# Altium PCB ARM2.22.PcbDoc (part 1 of 2)
Units mil, origin at the board's own origin, x right, y up, seen from the top; angles counter-clockwise.
Board outline 3929.03 x 3937.01 mil, 4 copper layers (Top Layer, GND, VCC, Bottom Layer); 147 components, 96 nets, 586 pads, 207 vias.
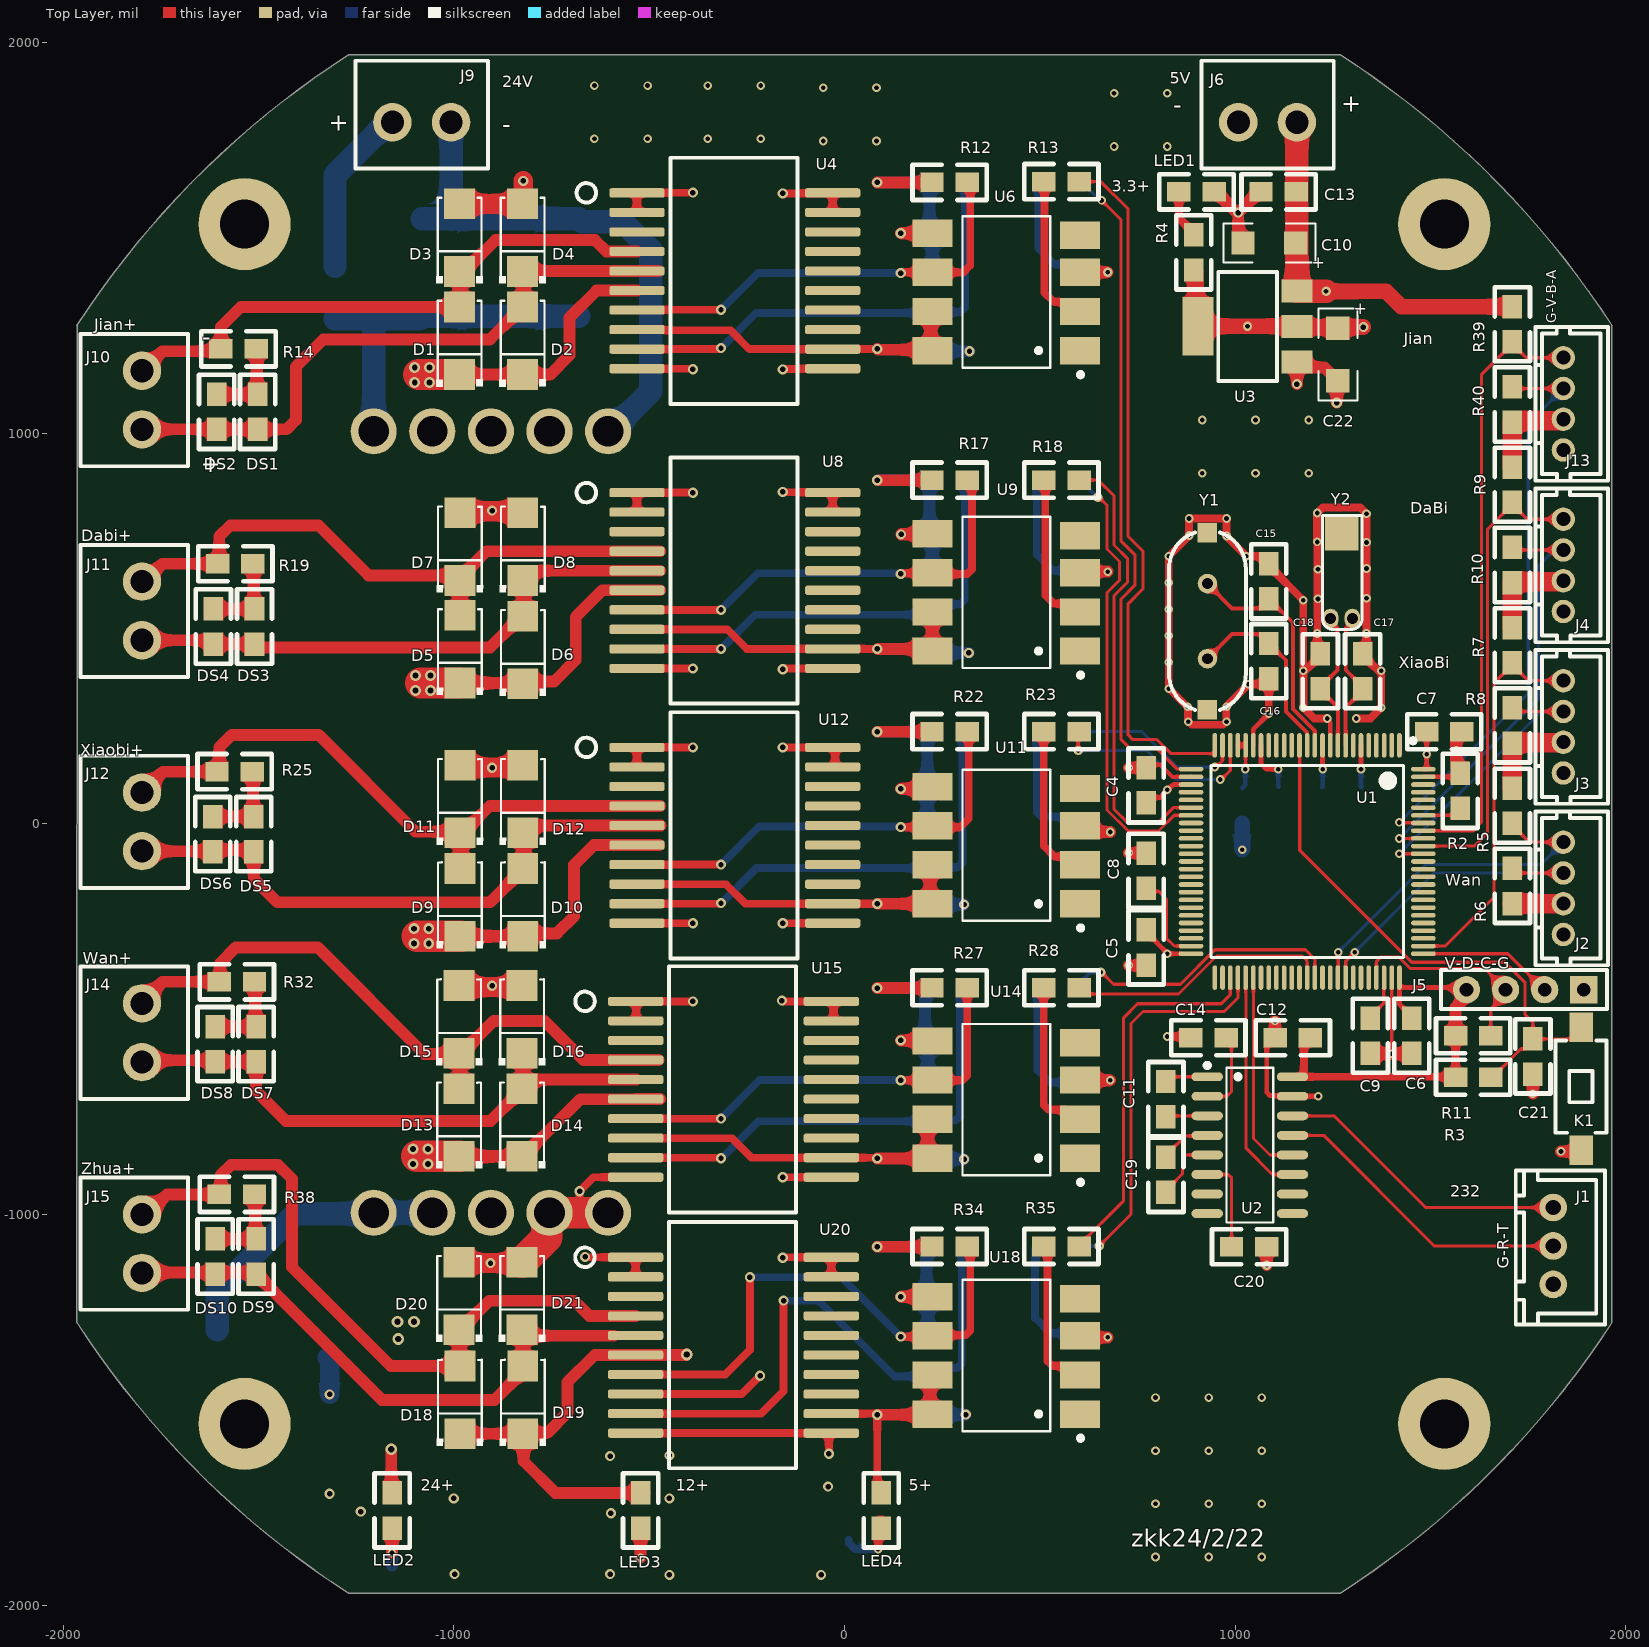
[diagram p0: Top Layer view]
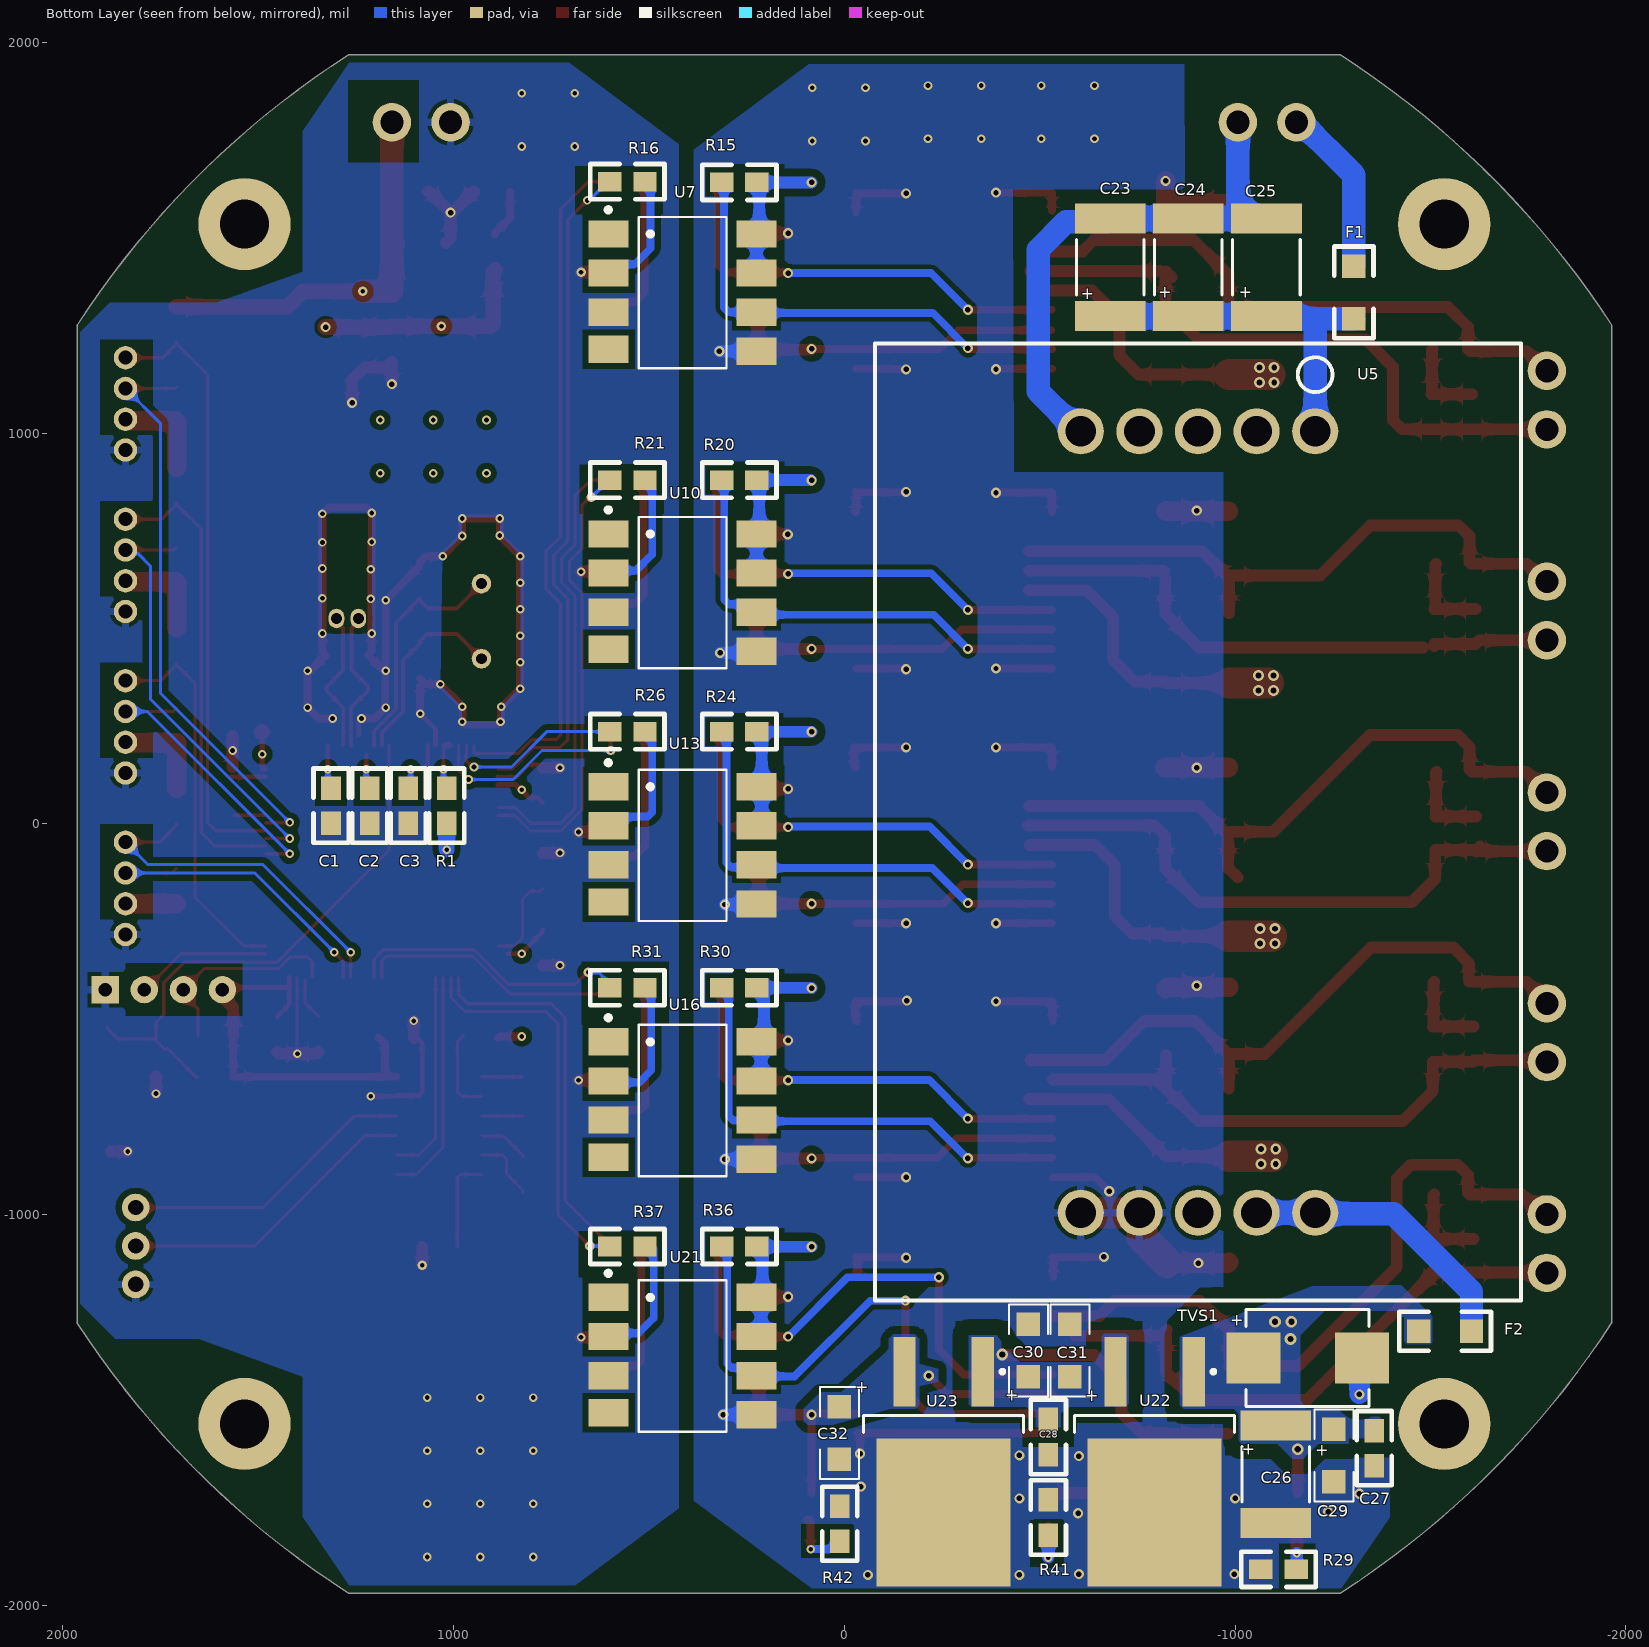
[diagram p1: Bottom Layer view, seen from below]
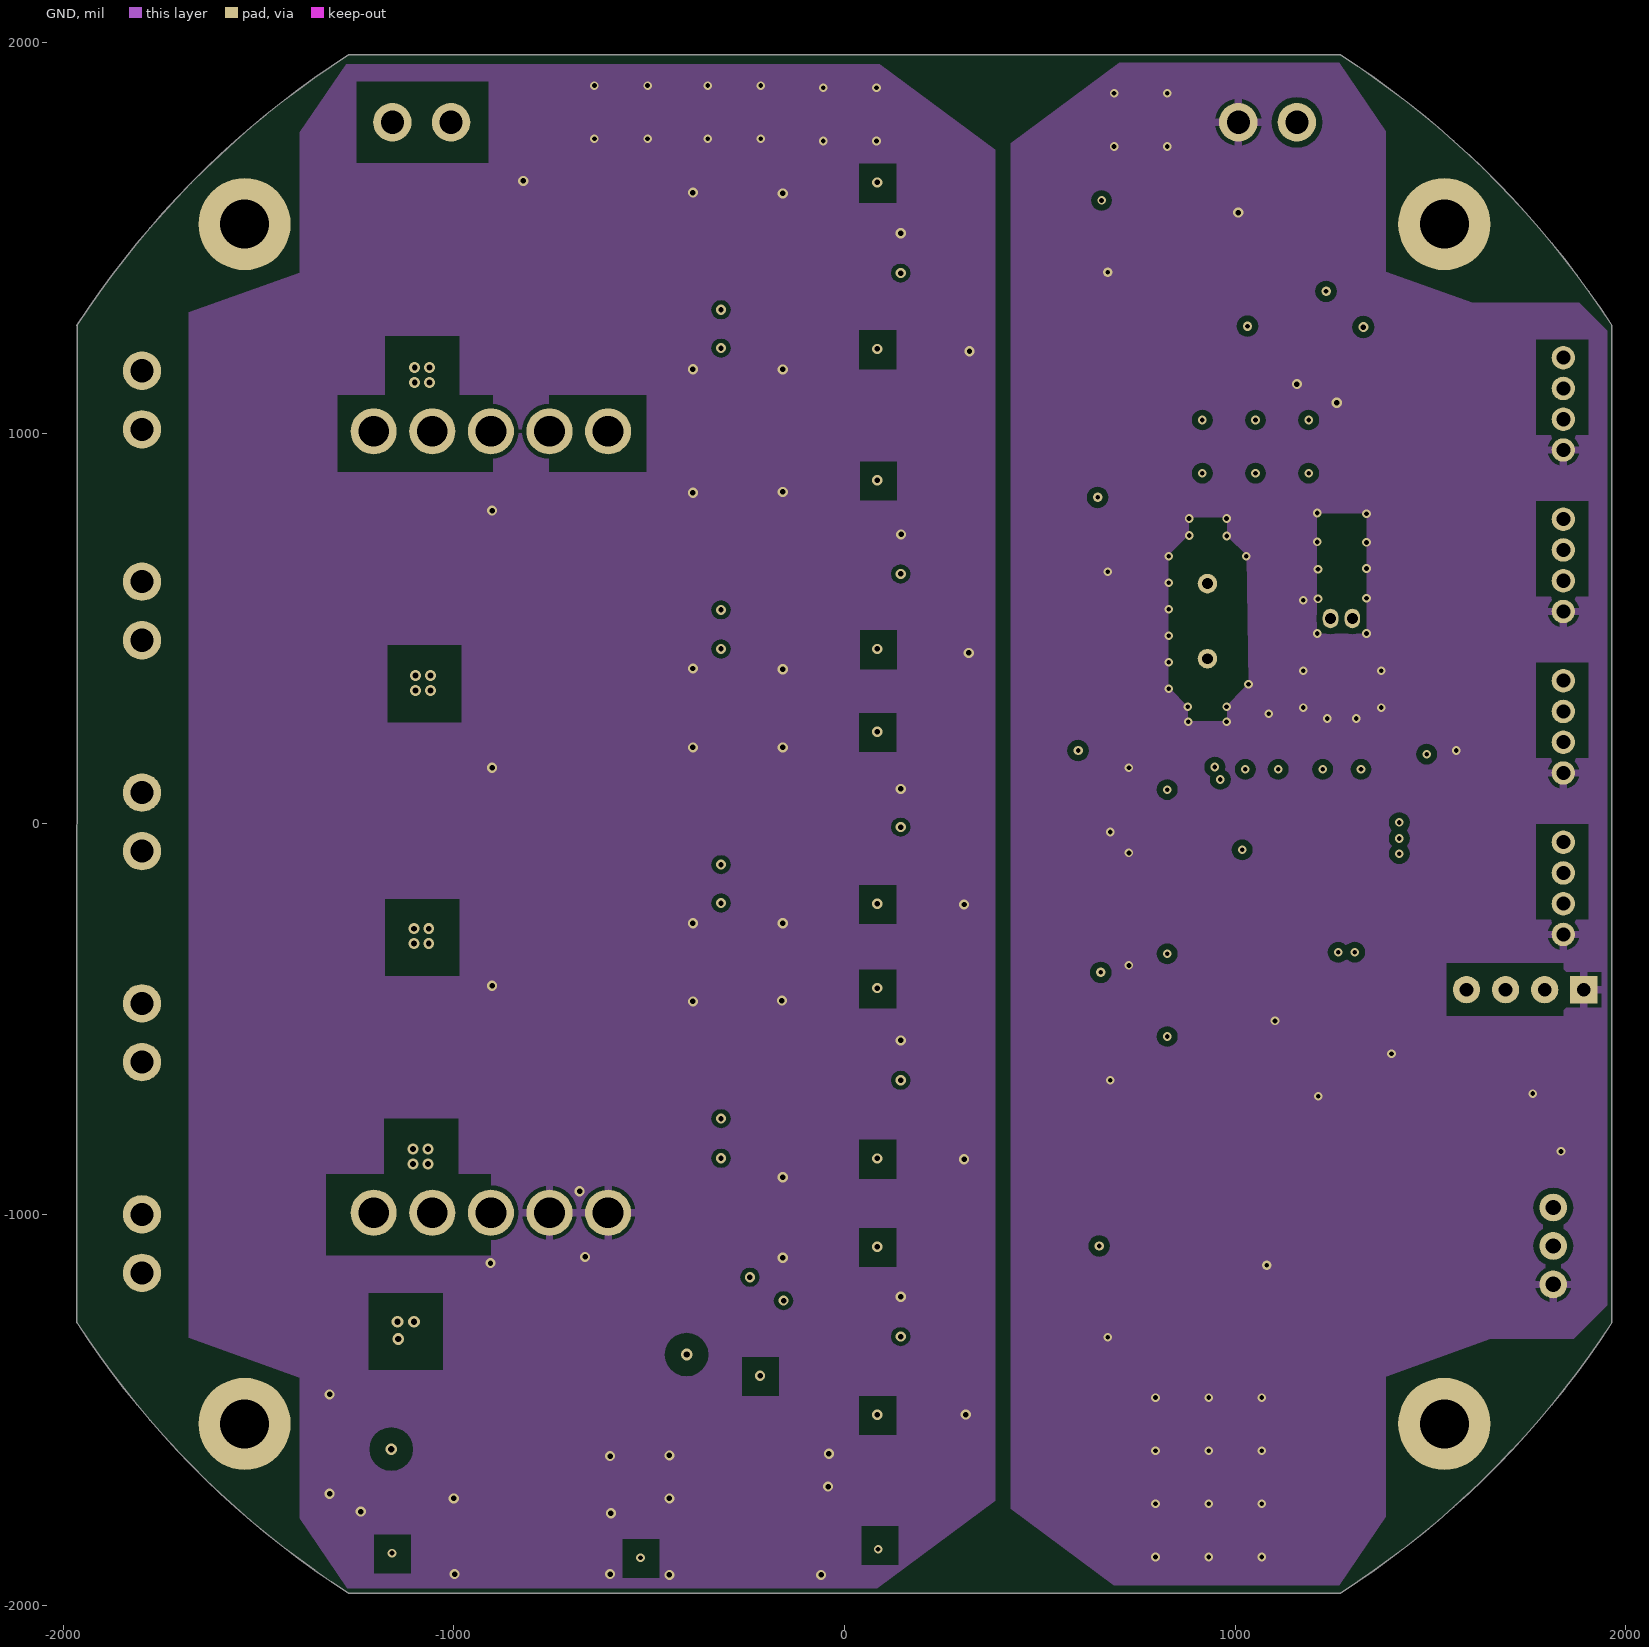
[diagram p2: GND]
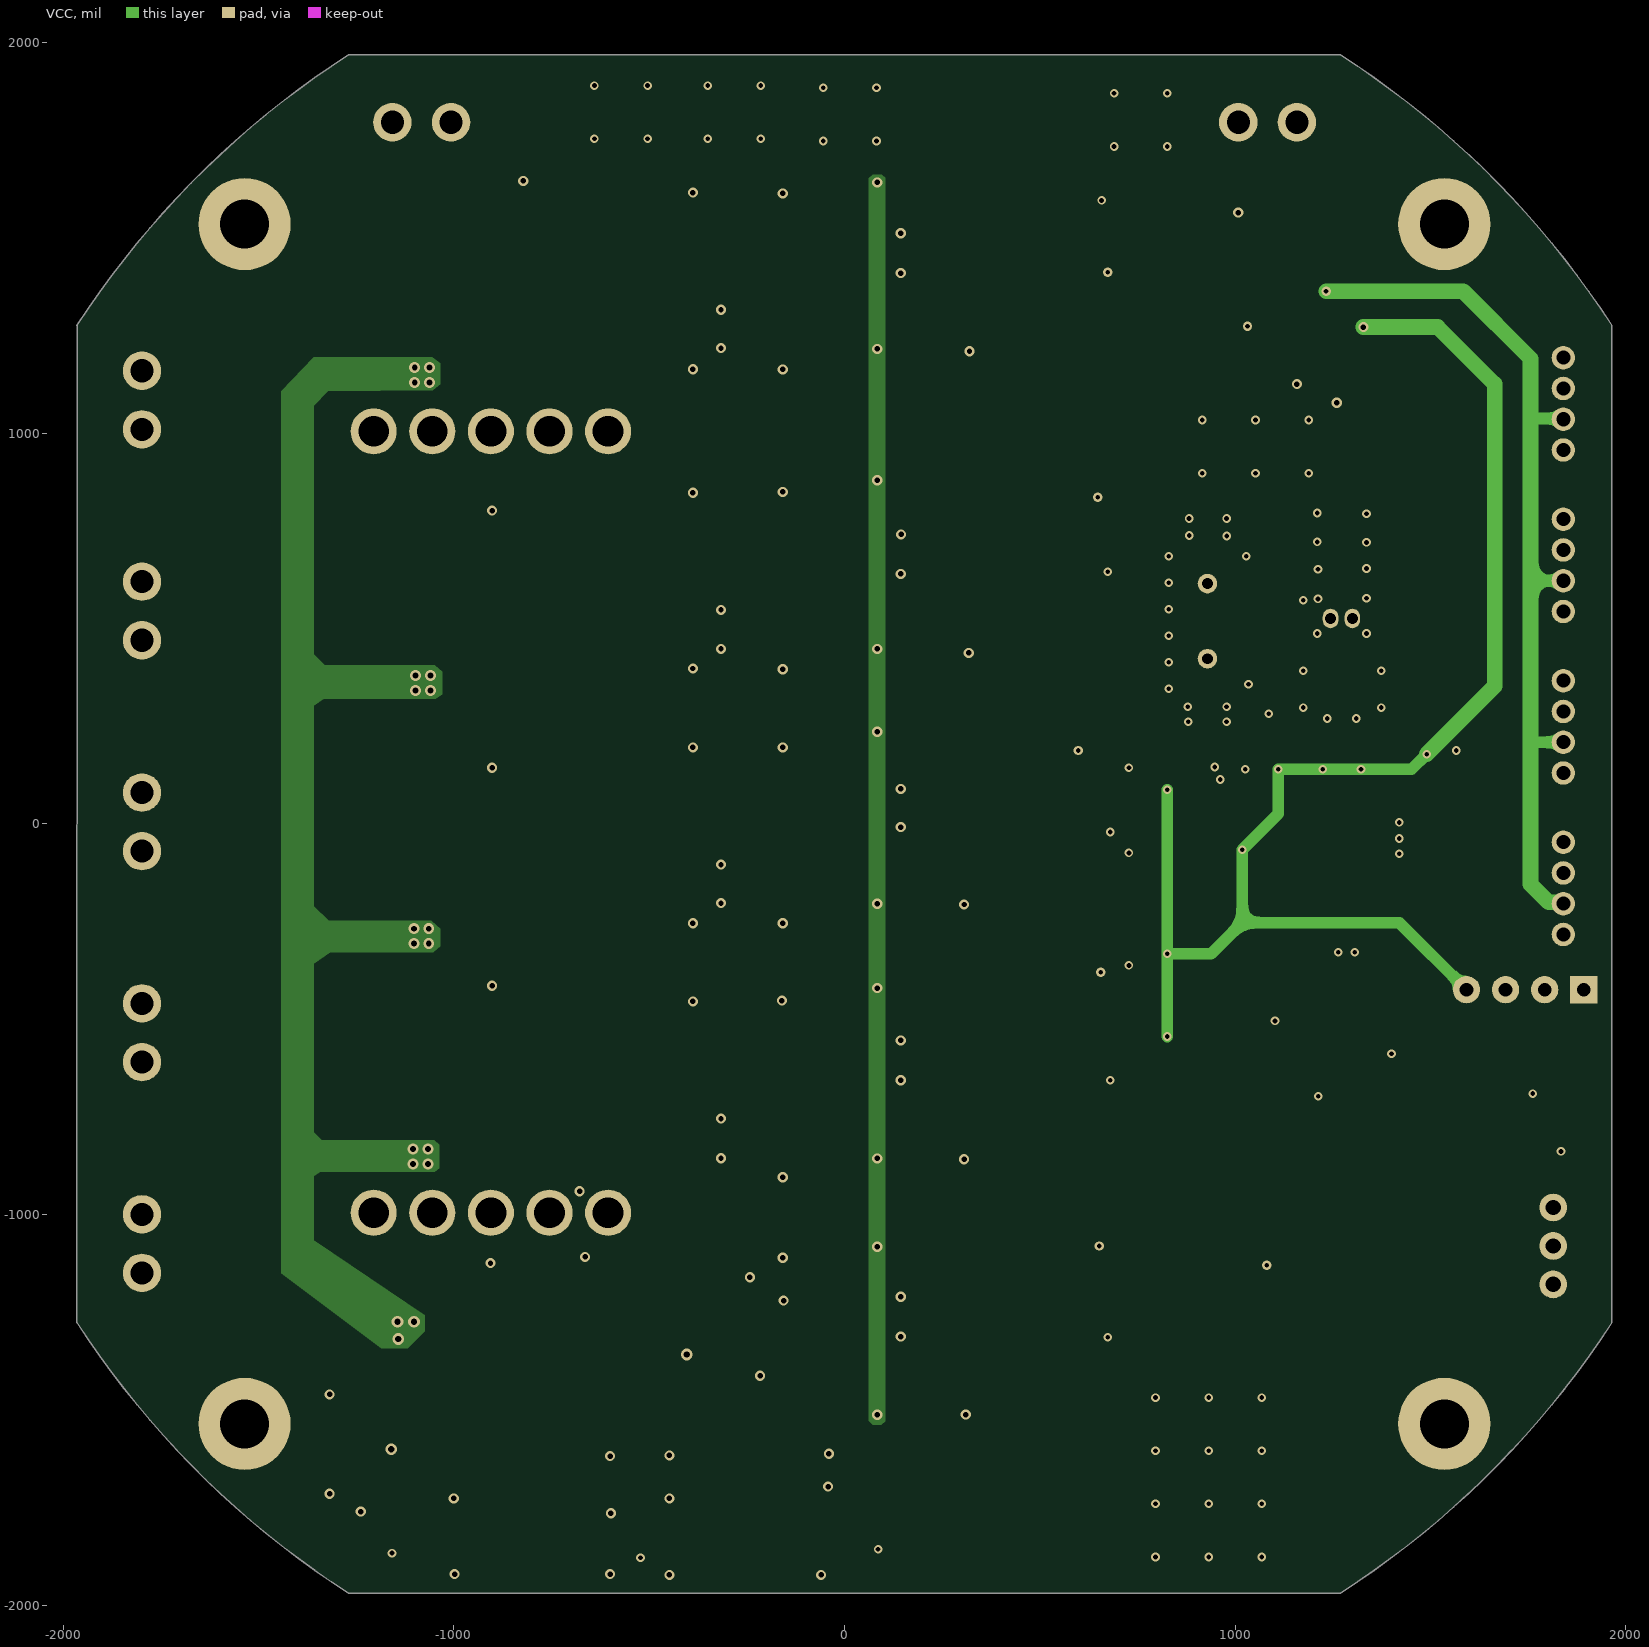
[diagram p3: VCC]

## Layer stack, top to bottom
Top Solder: solder mask 0.4, Solder Resist, Dk 3.5
Top Layer: signal copper 1.4
Dielectric1: core 12.6, FR-4, Dk 4.8
GND: signal copper 1.4
Dielectric2: prepreg 12.6, FR-4, Dk 4.8
VCC: signal copper 1.4
Dielectric3: core 12.6, FR-4, Dk 4.8
Bottom Layer: signal copper 1.4
Bottom Solder: solder mask 0.4, Solder Resist, Dk 3.5

## Board outline
-1964.34,-1276.22 -1964,1275.83 -1964.6,1275.83 cw(c0,0) -1269.8,1968.5 1269.8,1968.5 cw(c0,0) 1964.34,1276.22 1964,1276 1964,-1275.83 1964.42,-1276.1 cw(c0,0) 1269.8,-1968.5 -1269.8,-1968.5 cw(c0,0)

## Design rules (kind name [scope] priority, off if disabled: settings)
Clearance GND1 [InNet('GND1')] p1: gap=15 ignorepadtopadclearanceinfootprint=TRUE
Clearance netcf [InNet('NetF1_1')  or InNet('NetC23_1')or InNet('NetC23_2')] p2: gap=30 ignorepadtopadclearanceinfootprint=TRUE
Clearance 3.3 [InNet('+3.3V')] p3: gap=15 ignorepadtopadclearanceinfootprint=TRUE
Clearance +5V [InNet('+5V')] p4: gap=20 ignorepadtopadclearanceinfootprint=FALSE
Clearance V5 [InNet('VCC_5V')] p5: gap=20 ignorepadtopadclearanceinfootprint=TRUE
Clearance Polygon [InNet('VCC_24V') or InNet('OUT1') or  InNet('OUT2') or  InNet('OUT3') or  InNet('OUT4') or  InNet('OUT5') or  InNet('OUT6') or  InNet('OUT7') or  InNet('OUT8') or  InNet('OUT9') or  InNet('OUT10') OR InNet('VCC_12V')] p6: gap=40 ignorepadtopadclearanceinfootprint=TRUE
Clearance [All] p7: gap=11 ignorepadtopadclearanceinfootprint=TRUE
FabricationTestPointUsage TestPointUsage [All] p1: valid=0 allowmultiple=FALSE
FabricationTestpoint Testpoint [All] p1: side=3 testpointundercomponent=TRUE minsize=40 maxsize=100 preferedsize=60 minholesize=0 maxholesize=40 preferedholesize=32 testpointgrid=1 allowsidetop=TRUE allowsidebottom=TRUE usegrid=TRUE gridtolerance=0.01
HoleSize [All] p1: absolutevalues=TRUE maxlimit=150 minlimit=10 maxpercent=80.000 minpercent=20.000
MinimumSolderMaskSliver [All] p1: minsoldermaskwidth=2
PlaneClearance [InNet('GND1')] p1: clearance=10
PolygonConnect PGND2B [OnBottomLayer{ InNet('GND2') }] p1: thpad.connectstyle=Relief thpad.reliefconductorwidth=20 thpad.reliefentries=4 thpad.polygonreliefangle="90 Angle" thpad.airgapwidth=10 smdpad.connectstyle=Direct smdpad.reliefconductorwidth=10 smdpad.reliefentries=4 smdpad.polygonreliefangle="90 Angle" smdpad.airgapwidth=10 via.connectstyle=Direct via.reliefconductorwidth=10 via.reliefentries=4 via.polygonreliefangle="90 Angle" via.airgapwidth=10
PolygonConnect PV24 [InNet('VCC_24V')] p2: thpad.connectstyle=Relief thpad.reliefconductorwidth=50 thpad.reliefentries=4 thpad.polygonreliefangle="90 Angle" thpad.airgapwidth=8 smdpad.connectstyle=Direct smdpad.reliefconductorwidth=30 smdpad.reliefentries=4 smdpad.polygonreliefangle="90 Angle" smdpad.airgapwidth=12 via.connectstyle=Direct via.reliefconductorwidth=10 via.reliefentries=4 via.polygonreliefangle="90 Angle" via.airgapwidth=10
PolygonConnect PV12 [InNet('VCC_12V')] p3: thpad.connectstyle=Relief thpad.reliefconductorwidth=10 thpad.reliefentries=4 thpad.polygonreliefangle="90 Angle" thpad.airgapwidth=10 smdpad.connectstyle=Direct smdpad.reliefconductorwidth=10 smdpad.reliefentries=4 smdpad.polygonreliefangle="90 Angle" smdpad.airgapwidth=10 via.connectstyle=Direct via.reliefconductorwidth=10 via.reliefentries=4 via.polygonreliefangle="90 Angle" via.airgapwidth=10
PolygonConnect PV5 [InNet('VCC_5V')] p4: connectstyle=Direct reliefconductorwidth=10 reliefentries=4 polygonreliefangle="90 Angle" airgapwidth=10
PolygonConnect PGND1 [InNet('GND1')] p5: thpad.connectstyle=Relief thpad.reliefconductorwidth=20 thpad.reliefentries=4 thpad.polygonreliefangle="90 Angle" thpad.airgapwidth=10 smdpad.connectstyle=Direct smdpad.reliefconductorwidth=12 smdpad.reliefentries=4 smdpad.polygonreliefangle="90 Angle" smdpad.airgapwidth=10 via.connectstyle=Direct via.reliefconductorwidth=12 via.reliefentries=4 via.polygonreliefangle="90 Angle" via.airgapwidth=10
PolygonConnect PGND2D [InComponent('D3')or  InComponent('D4') or InComponent('D7')or InComponent('D8')or InComponent('D11')or InComponent('D12')or InComponent('D15')or InComponent('D16')or InComponent('D20')or InComponent('D21')or  InComponent('C3')or  InComponent('C2')or   InComponent('C1')] p6: connectstyle=Direct reliefconductorwidth=10 reliefentries=4 polygonreliefangle="90 Angle" airgapwidth=10
PolygonConnect PGND2 [InNet('GND2')] p7: thpad.connectstyle=Relief thpad.reliefconductorwidth=20 thpad.reliefentries=4 thpad.polygonreliefangle="90 Angle" thpad.airgapwidth=10 smdpad.connectstyle=Relief smdpad.reliefconductorwidth=20 smdpad.reliefentries=4 smdpad.polygonreliefangle="90 Angle" smdpad.airgapwidth=10 via.connectstyle=Direct via.reliefconductorwidth=12 via.reliefentries=4 via.polygonreliefangle="90 Angle" via.airgapwidth=12
PolygonConnect [All] p8: connectstyle=Relief reliefconductorwidth=10 reliefentries=4 polygonreliefangle="90 Angle" airgapwidth=10
RoomDefinition ARM2.22 [InComponentClass('ARM2.22')] p1: confinementstyle=ConfineIn formatcopy=TRUE lockcomponents=FALSE outline -4650,-8925 -2650,-8925 -2650,-7925 -4650,-7925
RoutingVias [All] p1: holewidth=7.5 width=15 viastyle="Through Hole" minholewidth=5 minwidth=10 maxholewidth=28 maxwidth=50
SilkToSilkClearance [All] p1: silktosilkclearance=1
SilkToSolderMaskClearance SilkscreenOverComponentPads [IsPad] p1: minsilkscreentomaskgap=1 clearancetoexposedcopper=TRUE
SolderMaskExpansion [All] p1: expansion=4 istentingtop=FALSE
Width [All] p1: maxlimit=200 minlimit=8 preferedwidth=10 toplayer_prefwidth=8 minimp=50.000000 maximp=50.000000 favimp=50.000000
23 further rules are at their usual default settings.

## Components (designator, comment, footprint, x,y, rotation, side; value= is the part's Value field where it differs from the comment)
C1 "104" 0805 1314,92 r270 bottom
C2 "104" 0805 1215.33,92 r270 bottom
C3 "104" 0805 1116.67,92 r270 bottom
C4 "104" 0805 772,54 r90 top
C5 "104" 0805 772,-271 r270 top
C6 "104" 0805 1452,-497 r270 top
C7 "104" 0805 1490,236 r0 top
C8 "4.7uF" 0805 772,-75 r270 top
C9 "4.7uF" 0805 1346,-587 r90 top
C10 "Cap Pol1" 钽电容小 1090,1492 r0 top value=10uF
C11 "104" 0805 822.59,-749 r90 top
C12 "104" 0805 1192.59,-547 r180 top
C13 "104" 0805 1066,1618 r0 top
C14 "104" 0805 976.59,-547 r180 top
C15 "22pF" 0805 1086,666 r270 top
C16 "22pF" 0805 1086,372 r90 top
C17 "22pF" 0805 1326,436 r270 top
C18 "22pF" 0805 1218,436 r270 top
C19 "104" 0805 822.59,-943 r90 top
C20 "104" 0805 1080.59,-1082 r180 top
C21 "104" 0805 1762,-550 r270 top
C22 "Cap Pol1" 钽电容小 1258,1204 r90 top value=10uF
C23 "Cap Pol1" 钽电容大 -680.15,1424.62 r180 bottom value=22uF
C24 "Cap Pol1" 钽电容大 -880.15,1424.62 r180 bottom value=100uF
C25 "Cap Pol1" 钽电容大 -1080.15,1424.62 r180 bottom value=100uF
C26 "Cap Pol1" 钽电容大 -1104,-1664 r0 bottom value=100uF
C27 "0.1uF" 0805 -1356,-1642.5 r90 bottom
C28 "0.1uF" 0805 -522,-1614 r90 bottom
C29 "Cap Pol1" 钽电容小 -1248,-1614 r90 bottom value=2.2uF
C30 "Cap Pol1" 钽电容小 -476,-1350 r270 bottom value=1uF
C31 "Cap Pol1" 钽电容小 -582,-1350 r270 bottom value=2.2uF
C32 "Cap Pol1" 钽电容小 18,-1556 r90 bottom value=1uF
D1 "Diode 1N4149" 肖特基二极管SS34 -984,1236.8 r90 top
D2 "Diode 1N4149" 肖特基二极管SS34 -822.85,1236.8 r90 top
D3 "Diode 1N4149" 肖特基二极管SS34 -984,1500.8 r90 top
D4 "Diode 1N4149" 肖特基二极管SS34 -822.85,1500.8 r90 top
D5 "Diode 1N4149" 肖特基二极管SS34 -983.15,447.39 r90 top
D6 "Diode 1N4149" 肖特基二极管SS34 -822,445.39 r90 top
D7 "Diode 1N4149" 肖特基二极管SS34 -983.15,709.96 r90 top
D8 "Diode 1N4149" 肖特基二极管SS34 -822,709.96 r90 top
D9 "Diode 1N4149" 肖特基二极管SS34 -983.15,-200.61 r90 top
D10 "Diode 1N4149" 肖特基二极管SS34 -822,-200.61 r90 top
D11 "Diode 1N4149" 肖特基二极管SS34 -983.15,63.96 r90 top
D12 "Diode 1N4149" 肖特基二极管SS34 -822,63.96 r90 top
D13 "Diode 1N4149" 肖特基二极管SS34 -985.15,-764 r90 top
D14 "Diode 1N4149" 肖特基二极管SS34 -824,-764 r90 top
D15 "Diode 1N4149" 肖特基二极管SS34 -985.15,-500.04 r90 top
D16 "Diode 1N4149" 肖特基二极管SS34 -824,-500.04 r90 top
D18 "Diode 1N4149" 肖特基二极管SS34 -983.15,-1474 r90 top
D19 "Diode 1N4149" 肖特基二极管SS34 -822,-1474 r90 top
D20 "Diode 1N4149" 肖特基二极管SS34 -985.15,-1208 r90 top
D21 "Diode 1N4149" 肖特基二极管SS34 -824,-1208 r90 top
DS1 "LED" 0805 -1502,1010 r90 top
DS2 "LED" 0805 -1607,1100 r270 top
DS3 "LED" 0805 -1510,460.5 r90 top
DS4 "LED" 0805 -1615,550.5 r270 top
DS5 "LED" 0805 -1512,-71 r90 top
DS6 "LED" 0805 -1617,19 r270 top
DS7 "LED" 0805 -1506,-608.5 r90 top
DS8 "LED" 0805 -1611,-518.5 r270 top
DS9 "LED" 0805 -1506,-1152 r90 top
DS10 "LED" 0805 -1611,-1062 r270 top
F1 "THERMAL FUSE" 1206 -1304,1428 r270 bottom
F2 "THERMAL FUSE" 1206 -1605,-1298 r0 bottom
J1 "CON3" CON3BB 1814,-1080.01 r270 top
J2 "CON4" CONN4B 1840,-164.63 r270 top
J3 "CON4" CONN4B 1840,248.7 r270 top
J4 "CON4" CONN4B 1840,662.04 r270 top
J5 "CON4" CON4 1742,-424 r0 top
J6 "CON2" CONN-TH_2P-P3.81_DB2EVC-3.81-2P-BK 1083,1796 r180 top
J9 "CON2" CONN-TH_2P-P3.81_DB2EVC-3.81-2P-BK -1082,1796 r180 top
J10 "CON2" CONN-TH_2P-P3.81_DB2EVC-3.81-2P-BK -1798,1085 r270 top locked
J11 "CON2" CONN-TH_2P-P3.81_DB2EVC-3.81-2P-BK -1798,545.25 r270 top locked
J12 "CON2" CONN-TH_2P-P3.81_DB2EVC-3.81-2P-BK -1798,5.5 r270 top locked
J13 "CON4" CONN4B 1840,1075.37 r270 top
J14 "CON2" CONN-TH_2P-P3.81_DB2EVC-3.81-2P-BK -1798,-534.25 r270 top locked
J15 "CON2" CONN-TH_2P-P3.81_DB2EVC-3.81-2P-BK -1798,-1074 r270 top locked
K1 "KEY4" 按钮 1883.42,-672.6 r270 top
LED1 "LED" 0805 856,1618 r0 top
LED2 "LED" 0805 -1158,-1712 r270 top
LED3 "LED" 0805 -522,-1712 r270 top
LED4 "LED" 0805 94,-1712 r270 top
R1 "10R" 0805 1018,92 r270 bottom
R2 "10K" 0805 1576,40 r90 top
R3 "1.5K" 0805 1654,-648 r180 top
R4 "10K" 0805 894,1508 r270 top
R5 "10K" 0805 1709.41,1.8 r90 top
R6 "10K" 0805 1709.41,-113.57 r270 top
R7 "10K" 0805 1709.41,412.53 r90 top
R8 "10K" 0805 1709.41,297.17 r270 top
R9 "10K" 0805 1709.41,823.27 r90 top
R10 "10K" 0805 1709.41,707.9 r270 top
R11 "10K" 0805 1654,-542 r180 top
R12 "332" 0805 224.04,1642.06 r0 top
R13 "201" 0805 600.36,1644.06 r180 top
R14 "10K" 0805 -1506,1216 r180 top
R15 "332" 0805 224.04,1642.06 r0 bottom
R16 "201" 0805 600.36,1644.06 r180 bottom
R17 "332" 0805 224.04,880.19 r0 top
R18 "201" 0805 600.36,880.19 r180 top
R19 "10K" 0805 -1514,666 r180 top
R20 "332" 0805 224.04,880.19 r0 bottom
R21 "201" 0805 600.36,880.19 r180 bottom
R22 "332" 0805 224.04,236.32 r0 top
R23 "201" 0805 600.36,236.32 r180 top
R24 "332" 0805 224.04,236.32 r0 bottom
R25 "10K" 0805 -1516,134 r180 top
R26 "201" 0805 600.36,236.32 r180 bottom
R27 "332" 0805 224.04,-419.21 r0 top
R28 "201" 0805 600.36,-419.21 r180 top
R29 "Res2" 0805 -1156,-1908 r0 bottom value=10K
R30 "332" 0805 224.04,-419.21 r0 bottom
R31 "201" 0805 600.36,-419.21 r180 bottom
R32 "10K" 0805 -1510,-404 r180 top
R34 "332" 0805 224.04,-1081.35 r0 top
R35 "201" 0805 600.36,-1081.35 r180 top
R36 "332" 0805 224.04,-1081.35 r0 bottom
R37 "201" 0805 600.36,-1081.35 r180 bottom
R38 "10K" 0805 -1510,-948 r180 top
R39 "10K" 0805 1709.41,1234 r90 top
R40 "10K" 0805 1709.41,1118.63 r270 top
R41 "10K" 0805 -522,-1820 r90 bottom
R42 "10K" 0805 12,-1836 r90 bottom
TVS1 "TVS" TVS -1185.62,-1366.45 r270 bottom
U1 "STM32F407VGT6" STM32F407VGT6 1182.94,-154 r180 top locked
U2 "MAX3232" MAX3232 1033.43,-816.98 r270 top
U3 "AMS1117-3.3_C347222" AMS1117 1035,1267.66 r90 top
U4 "L298P" L298P -280.7,1385.38 r180 top
U5 "URF4824QB-200W" URF4824QB-200W（24稳压） -910,0 r0 bottom locked
U6 "6n137" 6N137 414.36,1340 r0 top
U7 "6n137" 6N137 414.36,1381.94 r0 bottom
U8 "L298P" L298P -280.7,618.21 r180 top
U9 "6n137" 6N137 414.36,571 r0 top
U10 "6n137" 6N137 414.36,614 r0 bottom
U11 "6n137" 6N137 414.36,-76 r0 top
U12 "L298P" L298P -280.7,-34 r180 top
U13 "6n137" 6N137 414.36,-33.03 r0 bottom
U14 "6n137" 6N137 414.36,-727 r0 top
U15 "L298P" L298P -284,-684 r180 top
U16 "6n137" 6N137 414.36,-686 r0 bottom
U18 "6n137" 6N137 414.36,-1382 r0 top
U20 "L298P" L298P -284.24,-1339.06 r180 top
U21 "6n137" 6N137 414.36,-1340 r0 bottom
U22 "7812" 7812 -794,-1632 r180 bottom
U23 "7805" 7805 -254,-1632 r180 bottom
Y1 "XTAL8" XTAL8（晶振） 934,508 r270 top locked
Y2 "XTAL32-100" XTAL32-100（晶振） 1274,616 r90 top locked

## Footprints (in the part's own frame and the unit in brackets; to place one, negate y for a bottom-side part, rotate by r counter-clockwise, add the part's x,y. Pads: shape width x height; smd on the part's side, far side on the other; paste and mask are expansions set on the pad)
6N137 [mm]
  rect 2.6x1.78 smd mask+0.102: 1(4.796,-3.258) 2(4.796,-0.718) 3(4.796,1.822) 4(4.796,4.235) 5(-4.804,4.362) 6(-4.804,1.822) 7(-4.804,-0.718) 8(-4.804,-3.258)
  silkscreen extent -2.86,-4.98 4.98,5.47
0805 [mil]
  rect 60x50 smd: 1(0,0) 2(90,0)
  silkscreen extent -50,-45 140,45
1206 [mil]
  rect 60x60 smd: 1(0,0) 2(135,0)
  silkscreen extent -50,-50 185,50
7805 [mm]
  rect 1.45x4.5 smd: 1(2.54,5.848) 3(-2.54,5.848)
  rect 8.7x9.6 smd: 2(0,-3.302)
  silkscreen extent -5.2,1.9 5.2,5.97, body extent -5.2,-6.35 5.2,3, height 4.67
7812 [mm]
  rect 1.45x4.5 smd: 1(2.54,5.848) 3(-2.54,5.848)
  rect 8.7x9.6 smd: 2(0,-3.302)
  silkscreen extent -5.2,1.9 5.2,5.97, body extent -5.2,-6.35 5.2,3, height 4.67
AMS1117 [mil]
  rect 59x79 smd: 1(-84.88,-123.54) 2(5.67,-123.54) 3(96.22,-123.54)
  rect 150x79 smd: 4(6.34,130)
  silkscreen extent -134,-72 146,78
CON3BB [mm]
  round 1.8 hole 1 paste+0 mask+0.05: 1(-2.5,0) 2(0,0) 3(2.5,0)
  silkscreen extent -4.92,-2.44 5.09,3.38
CON4 [mil]
  rect 70x70 hole 35: 1(150,0)
  round 70 hole 35: 2(50,0) 3(-50,0) 4(-150,0)
  silkscreen extent -215,-50 210,50
CONN4B [mil]
  round 60 hole 36 paste+0 mask+1.97: 1(-118.11,0) 2(-39.37,0) 3(39.37,0) 4(118.11,0)
  silkscreen extent -197,-71 197,114
CONN-TH_2P-P3.81_DB2EVC-3.81-2P-BK [mm]
  round 2.5 hole 1.5: 1(-1.905,0) 2(1.905,0)
  silkscreen extent -4.3,-4 4.3,3
L298P [mm]
  rrect50% 3.6x0.6 smd: 1(6.361,-5.842) 2(6.361,-4.572) 3(6.361,-3.302) 4(6.361,-2.032) 5(6.361,-0.762) 6(6.361,0.508) 7(6.361,1.778) 8(6.361,3.048) 9(6.361,4.318) 10(6.361,5.588) 11(-6.361,5.588) 12(-6.361,4.318) 13(-6.361,3.048) 14(-6.361,1.778) 15(-6.361,0.508) 16(-6.361,-0.762) 17(-6.361,-2.032) 18(-6.361,-3.302) 19(-6.361,-4.572) 20(-6.361,-5.842)
  silkscreen extent -4.06,-8.13 10.28,7.87
MAX3232 [mil]
  oval 22.6x80.24 smd mask+4: 1(-169.98,-104.88) 2(-119.98,-104.88) 3(-69.98,-104.88) 4(-19.98,-104.88) 5(30.02,-104.88) 6(80.02,-104.88) 7(130.02,-104.88) 8(180.02,-104.88) 9(180.02,113.16) 10(130.02,113.16) 11(80.02,113.16) 12(30.02,113.16) 13(-19.98,113.16) 14(-69.98,113.16) 15(-119.98,113.16) 16(-169.98,113.16)
  silkscreen extent -205,-111 203,64
STM32F407VGT6 [mm]
  oval 0.3x1.6 smd paste-100 mask+0.051: 1(-6.032,-9.026) 2(-5.532,-9.026) 3(-5.032,-9.026) 4(-4.532,-9.026) 5(-4.032,-9.026) 6(-3.532,-9.026) 7(-3.032,-9.026) 8(-2.532,-9.026) 9(-2.032,-9.026) 10(-1.532,-9.026) 11(-1.032,-9.026) 12(-0.532,-9.026) 13(-0.032,-9.026) 14(0.468,-9.026) 15(0.968,-9.026) 16(1.468,-9.026) 17(1.968,-9.026) 18(2.468,-9.026) 19(2.968,-9.026) 20(3.468,-9.026) 21(3.968,-9.026) 22(4.468,-9.026) 23(4.968,-9.026) 24(5.468,-9.026) 25(5.968,-9.026) 51(5.968,6.073) 52(5.468,6.073) 53(4.968,6.073) 54(4.468,6.073) 55(3.968,6.073) 56(3.468,6.073) 57(2.968,6.073) 58(2.468,6.073) 59(1.968,6.073) 60(1.468,6.073) 61(0.968,6.073) 62(0.468,6.073) 63(-0.032,6.073) 64(-0.532,6.073) 65(-1.032,6.073) 66(-1.532,6.073) 67(-2.032,6.073) 68(-2.532,6.073) 69(-3.032,6.073) 70(-3.532,6.073) 71(-4.032,6.073) 72(-4.532,6.073) 73(-5.032,6.073) 74(-5.532,6.073) 75(-6.032,6.073)
  oval 1.6x0.3 smd paste-100 mask+0.051: 26(7.518,-7.476) 27(7.518,-6.977) 28(7.518,-6.476) 29(7.518,-5.977) 30(7.518,-5.476) 31(7.518,-4.977) 32(7.518,-4.476) 33(7.518,-3.977) 34(7.518,-3.476) 35(7.518,-2.977) 36(7.518,-2.476) 37(7.518,-1.976) 38(7.518,-1.477) 39(7.518,-0.976) 40(7.518,-0.477) 41(7.518,0.024) 42(7.518,0.523) 43(7.518,1.024) 44(7.518,1.523) 45(7.518,2.024) 46(7.518,2.523) 47(7.518,3.024) 48(7.518,3.523) 49(7.518,4.024) 50(7.518,4.523) 76(-7.582,4.523) 77(-7.582,4.024) 78(-7.582,3.523) 79(-7.582,3.024) 80(-7.582,2.523) 81(-7.582,2.024) 82(-7.582,1.523) 83(-7.582,1.024) 84(-7.582,0.523) 85(-7.582,0.024) 86(-7.582,-0.477) 87(-7.582,-0.976) 88(-7.582,-1.477) 89(-7.582,-1.976) 90(-7.582,-2.477) 91(-7.582,-2.977) 92(-7.582,-3.476) 93(-7.582,-3.977) 94(-7.582,-4.476) 95(-7.582,-4.977) 96(-7.582,-5.476) 97(-7.582,-5.977) 98(-7.582,-6.476) 99(-7.582,-6.977) 100(-7.582,-7.476)
  silkscreen extent -7.06,-9.47 6.22,4.77
TVS [mm]
  rect 3.3x3.5 smd: 1(0,3.525) 2(0,-3.525)
  silkscreen extent -3.15,-4 3.15,4
URF4824QB-200W（24稳压） [mm]
  round 3 hole 2: 1(-7.493,-25.527) 2(-3.683,-25.527) 3(0.127,-25.527) 4(3.937,-25.527) 5(7.747,-25.527) 6(7.747,25.273) 7(3.937,25.273) 8(0.127,25.273) 9(-3.683,25.273) 10(-7.493,25.273)
  silkscreen extent -20.87,-31.24 21.13,30.99
XTAL8（晶振） [mil]
  round 50 hole 28: 1(-107.13,-5) 2(85,-5)
  rect 50x50 smd: ""(-237.44,-5) ""(215.31,-5)
  silkscreen extent -238,-103 216,93
XTAL32-100（晶振） [mil]
  oval 50x40 hole 28: 1(-90,-26) 2(-90,30)
  rect 92.13x86 smd: ""(130,1)
  silkscreen extent -118,-51 174,51
按钮 [mm]
  rect 1.9x1.5 smd mask+0.102: 1(-3.876,0.059) 2(4.124,0.059)
  silkscreen extent -3.01,-1.61 2.99,1.69
肖特基二极管SS34 [mm]
  rect 2x2 smd: 1(-2.2,0.029) 2(2.2,0.029)
  silkscreen extent -2.98,-1.47 2.6,1.53
钽电容大 [mm]
  rect 4.6x1.95 smd: 1(0,-3.175) 2(0,3.175)
  silkscreen extent -2.2,-1.8 2.2,1.8
钽电容小 [mil]
  rect 60x60 smd: 1(65,-5) 2(-70,-5)
  silkscreen extent -120,-55 115,45

## Part data
C1 C2 C3 C4 C5 C6 C7 C8 C9 C27 C28: library part Cap, "Capacitor", LatestRevisionDate=17-Jul-2002, LatestRevisionNote="Re-released for DXP Platform.", PackageDescription="Radial Cap, Thru-Hole; 2 Leads; 0.3 in Pin Spacing", PackageReference=RAD-0.3, Published=8-Jun-2000, Publisher="Altium Limited"
C10 C22 C23 C24 C25 C26 C29 C30 C31 C32: "Polarized Capacitor (Radial)", LatestRevisionDate=17-Jul-2002, LatestRevisionNote="Re-released for DXP Platform.", PackageDescription="Polarized Capacitor (Radial); 2 Leads", PackageReference=RB7.6-15, Published=8-Jun-2000, Publisher="Altium Limited"
C11 C12 C13 C14 C15 C16 C17 C18 C19 C20 C21: library part CAP
D1 D2 D3 D4 D5 D6 D7 D8 D9 D10 D11 D12 D13 D14 D15 D16 D18 D19 D20 D21: "Computer Diode", Code_JEDEC=DO-204-AH, ComponentLink1Description="Manufacturer Link", ComponentLink1URL=http://www.national.com/, DatasheetVersion=1989, LatestRevisionDate=17-Jul-2002, LatestRevisionNote="Re-released for DXP Platform.", PackageDescription="Diode, Axial; Body 4.6 x 1.9 mm (LxDia. max), Lead Dia. 0.53 mm (max)", PackageReference=DO-35A, PackageVersion=1989, Published=8-Jun-2000, Publisher="Altium Limited"
DS1 DS2 DS3 DS4 DS5 DS6 DS7 DS8 DS9 DS10 LED1 LED2 LED3 LED4: PackageDocument=Feb-2002, LatestRevisionDate=17-Jul-2002, LatestRevisionNote="Re-released for DXP Platform.", PackageReference=3.2X1.6X1.1, Published=8-Jun-2000, Publisher="Altium Limited"
R1 R2 R4 R5 R6 R7 R8 R9 R10 R12 R13 R14 R15 R16 R17 R18 R19 R20 R21 R22 R23 R24 R25 R26 R27 R28 R30 R31 R32 R34 R35 R36 R37 R38 R39 R40 R41 R42: library part Res2, "Resistor", LatestRevisionDate=17-Jul-2002, LatestRevisionNote="Re-released for DXP Platform.", PackageDescription="Axial Device, Thru-Hole; 2 Leads; 0.4 in Pin Spacing", PackageReference=AXIAL-0.4, Published=8-Jun-2000, Publisher="Altium Limited"
R3 R11: library part RES
R29: "Resistor", LatestRevisionDate=17-Jul-2002, LatestRevisionNote="Re-released for DXP Platform.", PackageDescription="Axial Device, Thru-Hole; 2 Leads; 0.4 in Pin Spacing", PackageReference=AXIAL-0.4, Published=8-Jun-2000, Publisher="Altium Limited"
TVS1: library part 稳压二极管, "Zener Diode"
U1: "ARM Cortex-M4 32b MCU+FPU, 210DMIP, 1024 kB Flash, 192+4 kB RAM, Camera, 82 I/Os, 100-pin LQFP, -40 to +85癈, Tray", Operating Frequency (Processor Speed)=168MHz, 16-bit Timers (IC/OC/PWM)=12x16-bit(24/24/30), 32-bit Timer (IC/OC/PWM)="2x32-bit (8/8/8)", A/D Converter=16x12-bit, ComponentLink1Description="Manufacturer URL", ComponentLink1URL=http://www.st.com/, ComponentLink2Description="STM32F405/7 Datasheet", ComponentLink2URL=http://www.st.com/internet/com/TECHNICAL_RESOURCES/TECHNICAL_LITERATURE/DATASHEET/DM00037051.pdf, ComponentLink3Description="STM32F4 Web Page", ComponentLink3URL=http://www.st.com/internet/mcu/subclass/1521.jsp, D/A Converter=2x12-bit, DatasheetVersion="rev2, Jan-2012", Internal RAM=192kB, Other Timer Functions="2xWDG, RTC, 24-bit down counter", PackageDescription="100-Pin Low Profile Quad Flat Package, 14x14 mm Body, 0.5 mm Pitch", PackageReference=LQFP100, PackageVersion=2012, Serial Interface="3xSPI/2xI2S/2xI2C/3xUSART(IrDa, ISO7816)/3xUART/2xUSB OTG FS/HS, 2xCAN/Ethernet MAC10/100, SDIO"
U3: Dropout Voltage=1.3V@(1A), JLCPCB Part Class="Extended Part", LCSC Part Name=AMS1117-3.3, Manufacturer=UMW(广东友台半导体), Maximum Input Voltage=18V, Output Current=1A, Output Voltage=3.3V, Power Supply Rejection Ratio (PSRR)=60dB@(120Hz), Add into BOM=yes, Convert to PCB=yes, Datasheet=https://atta.szlcsc.com/upload/public/pdf/source/20211011/50CC665C22E3A66C08379A4A74BDA25C.pdf, Device=AMS1117-3.3_C347222, Manufacturer Part=AMS1117-3.3, Name=AMS1117-3.3, Number of Outputs=1, Output Polarity=正, Output Type=固定, Supplier=LCSC, Supplier Footprint=SOT-223, Supplier Part=C347222, Symbol=AMS1117-3.3_C347222
U22: library part L7912CV
Y1 Y2: LatestRevisionDate=17-Jul-2002, LatestRevisionNote="Re-released for DXP Platform.", Published=8-Jun-2000, Publisher="Altium Limited"

## Free pads (board coordinates)
  round 236.22 hole 125.98: 0(1535.43,1535.43) 1(-1535.43,1535.43) 2(1535.43,-1535.43) 3(-1535.43,-1535.43)

## Via types
v1: diameter 22, hole 12, Top Layer to Bottom Layer, 101 vias
v2: diameter 26, hole 14, Top Layer to Bottom Layer, 77 vias
v3: diameter 28, hole 15, Top Layer to Bottom Layer, 16 vias
v4: diameter 24, hole 12, Top Layer to Bottom Layer, 8 vias
v5: diameter 30, hole 16, Top Layer to Bottom Layer, 5 vias

## Nets (pads, with @x,y where several pads share a name; then routed paths per layer and width w, separated by ;. In a path a pad name is that pad's centre, name@x,y a point inside that pad or via, vN(x,y) a via of type N, cw(c..) or ccw(c..) an arc to the next point about the centre after c; other vN are vias at no path point)
+3.3V: C1.1 C2.1 C3.1 C4.1 C5.1 C6.1 C7.1 C12.1 C14.2 C22.1 J5.4 R1.2 R3.2 R4.2 R11.2 U1.6 U1.11 U1.19 U1.28 U1.50 U1.75 U1.100 U2.16 U3.2 U3.4 | length 6162.9
  Top Layer w12: C5.1@772,-271 772,-276 v1@820.09,-324.09 ; C4.1@772,54 785.97,67.97 807.97,67.97 v1@826.42,86.42 ; v1(826,-332.18) U1.50@861.47,-332.18 ; v1(826,88) 828.71,88 841.59,100.89 886.87,100.89 U1.28@886.97,100.98 ; U1.19@1066.1,201.37 1066.1,153.9 1080,140 v1(1110,140) ; U1.11@1223.67,175.87 1223.67,140.33 v1(1224,140) ; U1.6@1322.01,201.37 v1(1322,140) v1@1322.26,140.26 ; U1.75@1420.43,-393.11 U1.75@1420.43,-418.26 ; C6.1@1452,-493 1452,-492 1433,-473 1432,-473 1420.52,-461.52 1420.52,-418.61 1420.43,-418.51 U1.75@1420.43,-418.26 ; U1.100@1481.45,140.35 1489.91,140.35 1490,140.44 v1(1490,178.72) 1490,217 1496.5,223.5 C7.1@1502.5,223.5 ; R3.2@1563,-647 R3.2@1564,-648 ; J5.4@1592,-424 1586.35,-418.35 1420.52,-418.35 U1.75@1420.43,-418.26
  Top Layer w20: v1(826,-544) 883.59,-544 C14.2@886.59,-547 ; U2.16@1146.59,-647 U2.16@1174.71,-647 ; C12.1@1192.59,-547 1190.91,-547 1175.91,-562 1175.91,-645.8 U2.16@1174.71,-647 ; R3.2@1563,-647 U2.16@1174.71,-647 ; R3.2@1564,-648 R11.2@1564,-542
  Top Layer w30: R11.2@1564,-542 1564,-469.82 1591.5,-442.32 J5.4@1591.5,-431.5
  Top Layer w40: R4.2@894,1418 899,1413 899,1280.44 905.22,1274.22 v4(1031.44,1274.22) U3.2@1157.66,1274.22 ; U3.2@1158.54,1273.33 1160.71,1271.17 1263,1271.17 1263.83,1272 v2(1328,1272) ; C7.1@1490,236 C7.1@1490.93,236
  VCC w30: v1(826,-544) v1@826,-334.37 ; v1(826,88) v1(826,-332.18) 938.24,-332.18 1018,-252.43 ; v1(1490,178.72) 1451.28,140 v1(1322,140) v1(1224,140) v1(1110,140) 1110,26 v1(1018,-66) 1018,-252.43 ; J5.4@1592,-424 1420.43,-252.43 1018,-252.43
  VCC w40: v2(1328,1272) 1518,1272 1664,1126 1664,352.72 v1(1490,178.72)
  Bottom Layer w12: v1(1110,140) 1110,96 C3.1@1111,95 ; C2.1@1222.66,94 1224,95.34 v1(1224,140) ; v1(1322,140) 1322,96 C1.1@1324,94
  Bottom Layer w40: v1(1018,-66) R1.2@1018,2
+5V: C10.1 C13.2 J2.3 J3.3 J4.3 J6.1 J13.3 R5.2 R6.2 R7.2 R8.2 R9.2 R10.2 R39.2 R40.2 U3.3 | length 4185.9
  Top Layer w30: R8.2@1709.41,207.17 R8.2@1710.49,208.25 ; R40.2@1709.41,1028.63 R40.2@1713.09,1032.32 ; J13.3@1836.32,1032.32 J13.3@1840,1036 ; J3.3@1838.92,208.25 J3.3@1840,209.33
  Top Layer w40: v4(1232.62,1363.38) 1386,1363.38 1425.38,1324 R39.2@1709.41,1324 ; R6.2@1709.41,-203.57 R6.2@1709.62,-203.78 ; R10.2@1709.41,617.9 R10.2@1711.79,620.28 ; J4.3@1837.62,620.28 J4.3@1840,622.67 ; J2.3@1839.79,-203.78 J2.3@1840,-204
  Top Layer w50: R5.2@1709.41,91.8 R8.2@1709.41,207.17 ; R7.2@1709.41,502.53 R10.2@1709.41,617.9 ; R9.2@1709.41,913.27 R40.2@1709.41,1028.63 ; R6.2@1709.62,-203.78 J2.3@1839.79,-203.78 ; R8.2@1710.49,208.25 J3.3@1838.92,208.25 ; R10.2@1711.79,620.28 J4.3@1837.62,620.28 ; R40.2@1713.09,1032.32 J13.3@1836.32,1032.32
  Top Layer w60: C10.1@1155,1487 1158,1490 J6.1@1158,1796 ; U3.3@1158.12,1363.88 C10.1@1158.12,1487 ; U3.3@1158.54,1363.88 1159.04,1363.38 v4(1232.62,1363.38)
  VCC w30: 1756,209.33 J3.3@1844,209.33 ; 1756,622.67 J4.3@1844,622.67 ; 1756,1038 J13.3@1842,1038
  VCC w40: v4(1232.62,1363.38) 1583.81,1363.38 1756,1191.19 1756,1038 1756,622.67 1756,209.33 1756,-154 1802.17,-200.17 1840.17,-200.17 J2.3@1844,-204
A1: J13.1 R39.1 U1.92 | length 1564
  Top Layer w8: U1.92@1482.91,-17.13 1608.87,-17.13 1630,4 1630,1149.59 R39.1@1709.41,1229 ; R39.1@1709.41,1234 R39.1@1709.41,1229 ; J13.1@1840,1193.48 1744.93,1193.48 R39.1@1709.41,1229
A2: J4.1 R9.1 U1.90 | length 1196.3
  Top Layer w8: U1.90@1481.95,-56.5 1611.5,-56.5 1646,-22 1646,754.86 R9.1@1709.41,818.27 ; R9.1@1709.41,823.27 R9.1@1709.41,818.27 ; J4.1@1840,780.15 1747.53,780.15 R9.1@1709.41,818.27
A3: J3.1 R7.1 U1.77 | length 999.7
  Top Layer w8: U1.77@1481.45,-312.41 1537.59,-312.41 1662,-188 1662,360.13 R7.1@1709.41,407.53 ; R7.1@1709.41,412.53 R7.1@1709.41,407.53 ; J3.1@1840,366.81 1750.13,366.81 R7.1@1709.41,407.53
A4: J2.1 R5.1 U1.67 | length 911.6
  Top Layer w8: U1.67@1262.95,-393.03 1263.68,-392.3 v1(1263.68,-328.32) ; R5.1@1709.41,1.8 1709.41,-3.2 1752.72,-46.52 J2.1@1840,-46.52
  Bottom Layer w8: v1(1263.68,-328.32) 1488,-104 1782.52,-104 J2.1@1840,-46.52
B1: J13.2 R40.1 U1.93 | length 1483
  Top Layer w8: v1@1416,4 1416.72,3.28 1480.72,3.28 U1.93@1481.45,2.56 ; R40.1@1709.41,1118.63 1713.3,1114.74 J13.2@1840,1114.74
  Bottom Layer w8: v1(1420,4) 1750,334 1750,1024.74 J13.2@1840,1114.74
B2: J4.2 R10.1 U1.91 | length 1124.1
  Top Layer w8: v1@1418,-37.54 1482.18,-37.54 U1.91@1481.45,-36.81 ; R10.1@1709.41,707.9 1715.9,701.41 J4.2@1840,701.41
  Bottom Layer w8: v1(1420,-37) 1776,319 1776,660 1807.46,691.46 1830.05,691.46 J4.2@1840,701.41
B3: J3.2 R8.1 U1.89 | length 768.7
  Top Layer w8: v1@1418,-76 1418.1,-76.09 1481.35,-76.09 U1.89@1481.45,-76.19 ; R8.1@1709.41,297.17 1718.5,288.07 J3.2@1840,288.07
  Bottom Layer w8: v1(1420,-76) 1784.07,288.07 J3.2@1840,288.07
B4: J2.2 R6.1 U1.68 | length 828.1
  Top Layer w8: U1.68@1282.64,-393.03 1282.64,-351.36 v1(1306,-328) ; R6.1@1709.41,-113.57 1721.1,-125.26 J2.2@1840,-125.26
  Bottom Layer w8: v1(1306,-328) 1508.74,-125.26 J2.2@1840,-125.26
GND1: C1.2 C2.2 C3.2 C4.2 C5.2 C6.2 C7.2 C8.1 C9.1 C10.2 C12.2 C13.1 C15.1 C16.1 C17.1 C18.1 C20.1 C21.2 C22.2 J1.3 J2.4 J3.4 J4.4 J5.1 J6.2 J13.4 K1.2 LED1.2 R2.2 U1.10 U1.20 U1.27 U1.74 U1.99 U2.15 U3.1 U6.3 U7.3 U9.3 U10.3 U11.3 U13.3 U14.3 U16.3 U18.3 U21.3 | length 5058.7
  Top Layer w8: v1(1400,-588) 1400.75,-587.25 U1.74@1400.75,-393.11
  Top Layer w10: C4.2@770,152 808,152 839.33,120.67 U1.27@886.97,120.67
  Top Layer w12: v1(830,346.16) v1@831.02,346.16 ; v1@877.18,300 v1(878.2,300) v1@879.2,299 ; v1@879.2,263 v1(880.2,262) ; U1.27@886.87,120.76 U1.27@886.97,120.67 ; v1@977.91,781.91 v1(978,782) ; v1(1028,685.36) 1028.92,685.36 v1@1029.64,685.36 ; U1.20@1046.41,201.37 1046.41,242.41 v1(1086,282) ; C12.2@1100.59,-541 1099.59,-541 1080.59,-560 1080.59,-687 1088.56,-694.97 1144.56,-694.97 U2.15@1146.59,-697 v1(1212.59,-697) ; v1(1174,298) v1@1175,299 ; v1@1175,391 1177.91,393.91 v1@1180.91,393.91 ; C18.1@1210.29,442.71 C18.1@1220,433 ; v1(1236,270) 1236,267.29 1243.27,260.03 U1.10@1243.27,226.87 ; C17.1@1328,431 C17.1@1336,439 ; v1@1334,716 v1@1336,714 ; v1@1334.04,720.58 v1(1336,720.62) v1(1336,720.62) ; v1@1336,572.17 v1(1336,578) ; v1@1336,649.38 1332.38,653 1331.38,653 v1@1336,657.62 ; v1@1368,298 1368,300.71 v1@1374,306.71 ; U1.99@1481.45,120.67 R2.2@1570.67,120.67
  Top Layer w20: v1(830,346.16) v1(830,414) v1(830,481.84) v1(830,549.68) v1(830,617.52) v1(830,685.36) 882,737.36 v1@882,778 ; v1@831.02,346.16 v1@877.18,300 ; v1@879.2,263 v1@879.2,299 ; v1(880.2,262) 880.74,262 888.74,254 969.46,254 977.46,262 v1(978,262) ; v1(882,782) v1(978,782) ; v1@977,263 v1@977,299 ; v1@977.91,781.91 977.91,736.09 v1@1028,686 ; v1@978,300.92 978.38,300.92 978.38,302.38 v1(1034,358) 1072,358 C16.1@1086,372 ; v1@1029.64,685.36 1071,685.36 1086,670.36 C15.1@1086,666 ; v1(1086,282) C16.1@1086,353 ; C15.1@1088,659 v1(1174,573) v1(1174,392) ; v1(1174,298) 1202,270 v1(1236,270) ; v1@1175,299 v1@1175,391 ; v1@1180.91,393.91 C18.1@1220,433 ; v1@1209.71,722 v1@1209.71,795 ; v1(1209.96,487.52) 1210,652 v1(1210,722) ; v1(1210,796) 1224,810 1320,810 v1(1336,794) ; C18.1@1210.29,442.71 v1@1210.29,487.18 ; v1(1310,270) 1346,270 v1(1374,298) ; C17.1@1328,431 1374,385 v1@1374,306.71 ; C17.1@1336,439 v1(1336,487.52) v1@1336,572 ; v1(1336,578) v1@1336,649.38 ; v1@1336,657.62 v1@1336,714 ; v1(1336,720.62) v1@1336,789.38
  Top Layer w30: U14.3@591.15,-655.28 591.87,-656 v1(680.36,-656) ; U18.3@596.82,-1310.28 600.54,-1314 v1(674,-1314) ; U6.3@598.82,1411.72 599.1,1412 v4(674,1412) ; U11.3@600.54,-8 612.98,-20.44 v1(680.36,-20.44) ; U9.3@602.82,642.72 606.1,646 v1(674,646) ; v1(728,-362) C5.2@772,-362 ; v1(728,-74) C8.1@772,-74 ; v1(728,144) C4.2@772,144 ; LED1.2@946,1618 951,1618 1004,1565 v2(1008,1565) ; C10.2@1020,1487 1008,1499 v2(1008,1565) ; C13.1@1066,1618 1061,1618 v2(1008,1565) ; v4(1080.59,-1129) C20.1@1080.59,-1082 ; C12.2@1102,-548 v1(1102,-504) ; v2(1158,1126) 1158,1182.24 U3.1@1158.54,1182.78 1173.04,1168.28 1228.72,1168.28 C22.2@1263,1134 1260,1131 v2(1260,1078) ; C9.1@1346,-583 1351,-588 v1(1400,-588) 1447,-588 C6.2@1452,-583 ; R2.2@1566,145 v1(1566,188) C7.2@1566,226 ; v1(1762,-690) C21.2@1762,-646 ; v1(1834,-838) K1.2@1878,-838
  other v1: 796,-1876 932,-1876 1068,-1876 796,-1740 932,-1740 1068,-1740 796,-1604 932,-1604 1068,-1604 796,-1468 932,-1468 1068,-1468 978,300 1374,392 1212,576 1212,652 1336,654 978.44,737.14 882.52,738.41 690,1734 826,1734 690,1870 826,1870
GND2: C26.2 C27.1 C28.1 C29.2 C30.2 C31.2 C32.2 D3.2 D4.2 D7.2 D8.2 D11.2 D12.2 D15.2 D16.2 D20.2 D21.2 R29.2 R41.2 R42.2 TVS1.1 U4.1 U4.2 U4.10 U4.11 U4.19 U4.20 U5.6 U5.7 U6.5 U7.5 U8.1 U8.2 U8.10 U8.11 U8.19 U8.20 U9.5 U10.5 U11.5 U12.1 U12.2 U12.10 U12.11 U12.19 U12.20 U13.5 U14.5 U15.1 U15.2 U15.10 U15.11 U15.19 U15.20 U16.5 U18.5 U20.1 U20.2 U20.10 U20.11 U20.19 U20.20 U21.5 U22.2 U23.2 | length 5639.9
  Top Layer w20: -680,-995 -678,-993 v2(-678,-940) -642.21,-904.21 U15.10@-533.13,-904.21 ; v2(-664,-1108) -662.91,-1108 -661.85,-1109.06 -532.86,-1109.06 -534.67,-1110.87 U20.2@-534.67,-1159.06 ; U20.10@-534.67,-1559.06 U20.11@-33.8,-1559.06 -38.19,-1559.06 -40,-1560.87 v2(-40,-1612) ; U15.2@-533.13,-504.21 -533.13,-454.21 -532.92,-454 v2(-388,-454) ; U12.10@-531.13,-254 v2(-388,-254) ; U12.2@-531.13,146 U12.1@-531.13,196 v2(-388,196) ; U8.10@-531.13,398.21 -531.03,398.11 -388.11,398.11 v2(-388,398) ; U8.2@-531.13,798.21 U8.1@-531.13,848.21 -531.03,848.11 -388.11,848.11 v2(-388,848) ; U4.10@-531.13,1165.38 -389.38,1165.38 v2(-388,1164) ; U4.2@-531.13,1570 U4.1@-531.13,1615.38 ; U4.1@-529.69,1615.69 -388.31,1615.69 v2(-388,1616) ; v2(-160,-452) -158.38,-452 -156.16,-454.21 U15.20@-32.27,-454.21 ; v2(-158,-1110) -157.46,-1110 -156.52,-1109.06 U20.20@-33.8,-1109.06 ; v2(-158,-904) -157.89,-904.11 -32.37,-904.11 U15.11@-32.27,-904.21 ; v2(-158,-254) U12.11@-30.27,-254 ; v2(-158,196) U12.20@-30.27,196 -24,196 -24,147.81 -25.81,146 U12.19@-30.27,146 ; v2(-158,396) -156.38,396 -154.16,398.21 U8.11@-30.27,398.21 ; v2(-158,1163.69) -156.85,1164.84 -124.54,1164.84 -124,1165.38 U4.11@-30.27,1165.38 ; v2(-158,1614) -32.08,1614 -30.27,1612.19 U4.19@-30.27,1565.38 ; v2@-154,850 -153.11,849.11 -28.92,849.11 U8.20@-28.02,850 ; U20.20@-34,-1110 -33.8,-1110.2 U20.19@-33.8,-1159.06 ; U15.19@-32.27,-504.21 -29.81,-504.21 -28,-502.4 U15.20@-28,-454.21 ; U20.20@-32,-1110 U20.20@-30,-1108 ; U4.20@-30.58,1615.69 U4.20@-30.27,1615.38 ; U8.20@-30.27,848.21 U8.19@-30.27,798.21 -27.81,798.21 U8.19@-26,800.02
  Top Layer w30: v2(144,-1210) U18.5@212.58,-1210 ; v2(144,-554) U14.5@207.25,-554 ; v2(144,90) 213.14,90 U11.5@215.14,92 ; v2(144,1512) U6.5@212,1512 ; v2(145,741) 146,742 U9.5@220,742
  Top Layer w50: D20.2@-984,-1121.39 -981.39,-1124 v2(-906,-1124) D21.2@-824,-1124 ; D15.2@-984,-417.43 -826.57,-417.43 D16.2@-822,-422 ; D3.2@-982.85,1587.41 D4.2@-824,1587.41 -822,1589.41 v2(-822,1646) ; D11.2@-982,144.57 -820.57,144.57 D12.2@-820,144 ; D7.2@-982,800.57 -823.43,800.57 D8.2@-822,802
  Top Layer w80: D21.2@-825.15,-1121.39 -762.29,-1058.53 -762.29,-1002.29 U5.7@-755,-995 -680,-995 U5.6@-605,-995
  Bottom Layer w30: U16.5@214.16,-858 v2(306,-858) ; U21.5@218.86,-1511.72 v2(310.28,-1511.72) ; U13.5@223.66,-206 v2(306,-206) ; U7.5@224.88,1210.22 319.78,1210.22 v2(320,1210) ; U10.5@225.16,438 v2(318,438)
  Bottom Layer w50: TVS1.1@-1324.4,-1366.45 -1318,-1372.85 v2(-1318,-1460)
  other v1: -54,1748 82,1748 -640,1754 -504,1754 -350,1754 -214,1754 -54,1884 82,1884 -640,1890 -504,1890 -350,1890 -214,1890
  other v2: -448,-1922 -60,-1922 -998,-1920 -600,-1920 -598,-1764 -1238,-1760 -1000,-1726 -448,-1726 -1318,-1714 -42,-1696 -600,-1618 -448,-1616 -902,-414 -902,144 -902,802 -158,850
IN1: R12.2 U4.7 U6.6 | length 1115.5
  Top Layer w20: U4.7@-530.51,1316 v2(-316,1316) ; v2(144,1410) 145.62,1410 147.62,1412 220.58,1412 220.86,1411.72 304,1411.72 322,1429.72 322,1634.1 R12.2@314.04,1642.06
  Bottom Layer w20: v2(-316,1316) -222,1410 v2(144,1410)
IN2: R15.2 U4.9 U7.6 | length 1190.8
  Top Layer w20: U4.9@-531.13,1215.38 -318.62,1215.38 v2(-316,1218)
  Bottom Layer w20: v2(-316,1218) -225.78,1308.22 U7.6@224.88,1308.22 ; U7.6@224.88,1310.22 296.5,1310.22 308.22,1321.94 R15.2@308.22,1630.06
IN3: R17.2 U8.7 U9.6 | length 1120
  Top Layer w20: U8.7@-531.13,548.21 -531.03,548.11 -420.11,548.11 -420,548 v2(-316,548) ; v2(144,640) 145.62,640 147.62,642 222.58,642 224.86,639.72 314.28,639.72 326,651.44 R17.2@326,874
  Bottom Layer w20: v2(-316,548) -222,642 v2@138.68,642